# EAGLE board M_C_ext_esp32 (EAGLE 9.6.2)
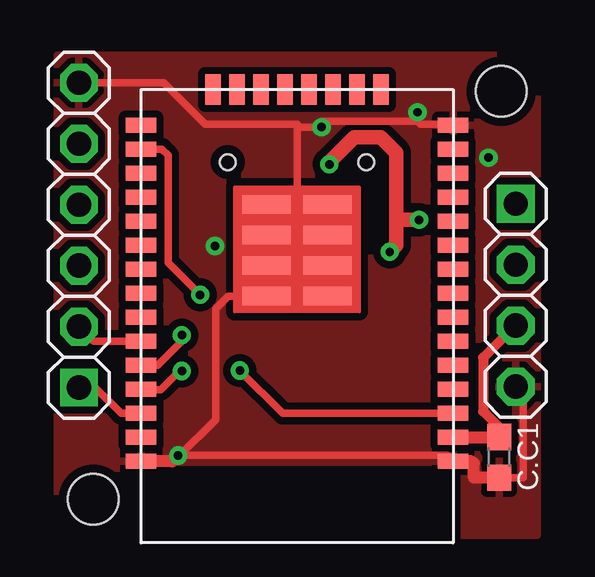
[diagram p0: board, top side]
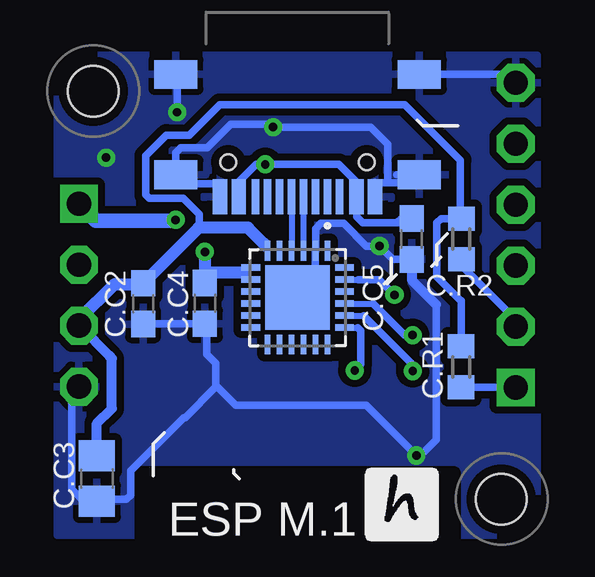
[diagram p1: board, bottom side, seen from below]

No outline drawn. Coordinates in mm, seen from the top.
Copper layers (1*16): Top 0.035mm / dielectric 1.5mm / Bottom 0.035mm
Design rules "default *": minimum track width 10mil, minimum drill 0.35mm, track to track 6mil, track to pad 6mil, pad to pad 6mil, via to via 10mil, smd to smd 10mil, copper to edge 15mil, drill to drill 40mil, minimum pad ring 10mil, minimum via ring 8mil, stop-mask expansion 4mil, vias tented up to drill 0mil, thermal gap 10mil
Holes 2.1 mm at 2,2 19,19

## Footprints (pad centres in the part's own frame; a part is rotated, then mirrored left to right if it is on the bottom)
C0603 = smd 1.1 x 1: 1 -0.85,0; 2 0.85,0
C0805 = smd 1.3 x 1.5: 1 -0.95,0; 2 0.95,0
1X06 = drill 1.016 pad 1.575 square: 1 -6.35,0 | drill 1.016 pad 1.575 octagon: 2 -3.81,0; 3 -1.27,0; 4 1.27,0; 5 3.81,0; 6 6.35,0
R0603 = smd 1 x 1.1: 1 -0.85,0; 2 0.85,0
TTGO-MICRO-32 = smd 1.27 x 0.635: 3V3 -6.5,5; EN -6.5,4; GND1 -6.5,6; GND2 -6.5,-8; GND3 6.5,6; IO0 6.5,-7; IO2 6.5,-8; IO4 6.5,-6; IO5 6.5,-3; IO12 -6.5,-7; IO14 -6.5,-6; IO16 6.5,-5; IO17 6.5,-4; IO18 6.5,-2; IO19 6.5,-1; IO21 6.5,1; IO22 6.5,4; IO23 6.5,5; IO25 -6.5,-3; IO26 -6.5,-4; IO27 -6.5,-5; IO32 -6.5,-1; IO33 -6.5,-2; IO34 -6.5,1; IO35 -6.5,0; NC 6.5,0; RXD0 6.5,2; TXD0 6.5,3; VN -6.5,2; VP -6.5,3 | smd 0.635 x 1.27: CLK 0.5,-9.5; CMD -0.5,-9.5; IO13 -3.5,-9.5; IO15 3.5,-9.5; SD0 1.5,-9.5; SD1 2.5,-9.5; SD2 -2.5,-9.5; SD3 -1.5,-9.5 | smd 2.032 x 0.762: GND4 -1.27,-0.889; GND5 1.27,-0.889; GND6 -1.27,-2.159; GND7 1.27,-2.159; GND8 -1.27,-3.429; GND9 -1.27,-4.699; GND10 1.27,-3.429; GND11 1.27,-4.699
1X04 = drill 1.016 pad 1.575 square: 1 -3.81,0 | drill 1.016 pad 1.575 octagon: 2 -1.27,0; 3 1.27,0; 4 3.81,0
QFN50P400X400X80-25N = smd 0.81 x 0.26: 1 -1.955,1.25; 2 -1.955,0.75; 3 -1.955,0.25; 4 -1.955,-0.25; 5 -1.955,-0.75; 6 -1.955,-1.25; 13 1.955,-1.25; 14 1.955,-0.75; 15 1.955,-0.25; 16 1.955,0.25; 17 1.955,0.75; 18 1.955,1.25 | smd 0.26 x 0.81: 7 -1.25,-1.955; 8 -0.75,-1.955; 9 -0.25,-1.955; 10 0.25,-1.955; 11 0.75,-1.955; 12 1.25,-1.955; 19 1.25,1.955; 20 0.75,1.955; 21 0.25,1.955; 22 -0.25,1.955; 23 -0.75,1.955; 24 -1.25,1.955 | smd 2.68 x 2.68: 25 0,0
USB-C = smd 0.6 x 1.45: A1B12 -3.235,3.825; A4B9 -2.46,3.825; B1A12 3.215,3.825; B4A9 2.44,3.825 | smd 0.3 x 1.45: A5 -1.26,3.825; A6 -0.26,3.825; A7 0.24,3.825; A8 1.24,3.825; B5 1.74,3.825; B6 0.74,3.825; B7 -0.76,3.825; B8 -1.76,3.825 | smd 1.8 x 1.2: SH1 -5.08,2.91; SH2 -5.08,-1.27; SH3 5.06,-1.27; SH4 5.06,2.91 | hole 0.65: 2.88,2.38; -2.9,2.38

## Placement (x,y rotation side)
C.C1  100n  [C0603]  18.91,3.74 270 top
C.C2  100n  [C0603]  16.92,10.15 270 bottom
C.C3  22u  [C0805]  18.85,2.86 270 bottom
C.C4  100n  [C0603]  14.35,10.16 90 bottom
C.C5  10u  [C0603]  5.73,12.84 90 bottom
C.J2  [1X06]  1.4,13 90 top
C.R1  2k2  [R0603]  3.68,7.51 90 bottom
C.R2  2k2  [R0603]  3.66,12.84 90 bottom
C.U1  TTGO-MICRO-32  [TTGO-MICRO-32]  10.49,9.58 180 top
JP1  [1X04]  19.6,10.5 270 top
U1  CP2104-F03-GM  [QFN50P400X400X80-25N]  10.49,10.4 270 bottom
U$1  USB-C  [USB-C]  10.5,18.43 180 bottom

## Library data of the parts
C.C1-C.C5 = rcl; SPICEPREFIX: C
C.J2 JP1 = pinhead2
C.R1 C.R2 = rcl; SPICEPREFIX: R
C.U1 U$1 = hugo
U1 = CP2104; AVAILABILITY: Unavailable; DESCRIPTION: USB Bridge, USB to UART USB 2.0 UART Interface 24-QFN (4x4); MF: Silicon Labs; MP: CP2104; PACKAGE: QFN-24 Silicon Labs; PRICE: None

## Nets
GND: C.C1.2 C.C2.2 C.C3.2 C.C4.1 C.C5.1 C.J2.6 C.U1.GND1 C.U1.GND2 C.U1.GND3 C.U1.GND4 C.U1.GND5 C.U1.GND6 C.U1.GND7 C.U1.GND8 C.U1.GND9 C.U1.GND10 C.U1.GND11 JP1.4 U1.2 U1.25 U$1.A1B12 U$1.B1A12 U$1.SH1 U$1.SH2 U$1.SH3 U$1.SH4
N$1: U1.4 U$1.A7
N$2: U1.3 U$1.A6
PROG: C.U1.IO0 U1.23
RESET: C.U1.EN U1.19
RX: C.U1.TXD0 U1.20
SCL: C.J2.1 C.R1.1 C.U1.IO22
SDA: C.J2.2 C.R2.1 C.U1.IO21
TX: C.U1.RXD0 U1.21
VCC: C.C1.1 C.C2.1 C.C3.1 C.R1.2 C.R2.2 C.U1.3V3 JP1.3 U1.6
VIO: U1.5
VUSB: C.C4.2 C.C5.2 JP1.1 U1.7 U1.8 U$1.A4B9 U$1.B4A9

## Tracks (layer width: path | path; a pad name or v marks a point on that pad's centre or on a via)
GND  (via drill 0.35)
  Top 0.305: C.U1.GND2 16.94,17.63 15.65,17.63 15.51,17.77 v15.51,18.12 15.51,17.75 11.51,17.75 v11.51,17.5 10.49,17.5 | v5.54,3.82 5.29,3.57 | C.U1.GND3 | C.J2.6 4.93,19.35 6.66,17.63 10.49,17.63 10.49,17.5 | C.U1.GND4 10.11,12.12 | 18.91,2.91 C.C1.2 19.91,2.9 19.91,6.38 JP1.4 | 10.49,17.5 10.49,14.5 | 10.49,14.5 10.49,13.74 11.23,13.01 C.U1.GND8 | C.U1.GND5 7.62,10.46 7.09,9.94 7.09,5.31 5.61,3.82 v5.54,3.82 | v5.54,3.82 16.74,3.82 C.U1.GND1 | C.U1.GND9 11.76,13.37 12.32,12.81 12.18,12.81 10.49,14.5
  Top 0.508: 5.29,3.57 C.U1.GND3 | C.C1.2 17.86,2.9 17.86,3.48 17.76,3.58 C.U1.GND1 16.95,3.61
  Bottom 0.305: C.C3.2 18.78,1.91 | 4.71,10.11 4.71,4.47 5.36,3.82 v5.54,3.82 7.62,5.91 13.06,5.91 13.83,6.67 13.9,6.67 | 15.49,18.12 v15.51,18.12 15.51,19.65 U$1.SH3 | 5.75,11.96 C.C5.1 6.52,11.99 v7.07,12.55 7.62,12.55 8.56,13.49 9.53,13.49 9.74,13.27 U1.2 9.74,11.7 10.49,10.96 U1.25 9.74,11.15 9.74,11.95 | C.C2.2 C.C4.1 14.27,9.23 14.27,8.05 13.89,7.67 13.9,7.66 13.9,6.67 | 6.35,15.52 U$1.SH1 5.75,15.19 7.26,15.19 | U$1.A1B12 7.26,15.19 | 7.26,15.19 7.26,15.21 | U$1.SH4 15.56,16.43 15.36,16.64 14.25,16.64 13.27,17.62 11.62,17.62 v11.51,17.5 7.44,17.5 6.73,16.79 6.73,15.24 | U$1.SH2 1.75,19.7 C.J2.6 | C.C3.2 18.77,1.99 17.62,1.99 17.45,2.16 17.45,3.18 15.22,5.4 15.18,5.4 13.9,6.67 | 15.32,15.52 U$1.SH4 | U$1.SH4 15.18,15.14 13.82,15.14 13.71,15.04 U$1.B1A12 | JP1.4 19.9,6.39 19.9,2.42 19.39,1.91 C.C3.2
  Bottom 0.406: C.C5.1 5.73,11.12 4.71,10.11
  other vias: 18.47,16.23
  pour Top (isolate 0.305): 0.5,0.5 0.5,20.5 20.5,20.5 20.5,0.5
  pour Bottom (isolate 0.305): 0.5,20.5 20.5,20.5 20.5,0.5 0.5,0.5
N$1
  Bottom 0.254: U$1.A7 U1.4
  Bottom 0.305: U$1.A7 | U$1.A7
N$2
  Bottom 0.254: U1.3 U$1.A6
PROG  (via drill 0.35)
  Top 0.305: C.U1.IO0 4.32,16.58 4.33,16.59 4.86,16.59 5.12,16.33 5.12,11.85 v6.45,10.52
  Bottom 0.254: 8.53,11.16 U1.23 7.96,11.15
  Bottom 0.305: v6.45,10.52 7.09,11.15 7.96,11.15
RESET  (via drill 0.35)
  Top 0.305: C.U1.EN 9.9,5.57 v8.11,7.36
  Bottom 0.254: U1.19 7.98,9.15
  Bottom 0.305: 7.98,9.15 7.85,9.02 7.85,7.62 v8.11,7.36
RX  (via drill 0.35)
  Top 0.305: C.U1.TXD0 4.01,6.56 4.82,6.56 5.6,7.34 v5.69,7.34
  Bottom 0.254: U1.20 7.74,9.65
  Bottom 0.305: v5.69,7.34 5.69,7.6 7.74,9.65
SCL
  Top 0.305: C.U1.IO22 3.16,5.58 2.09,6.65 C.J2.1
  Bottom 0.305: C.R1.1 1.4,6.66 C.J2.1
SDA
  Top 0.305: C.U1.IO21 2.01,8.58 C.J2.2
  Bottom 0.305: C.R2.1 3.65,11.72 1.4,9.47 C.J2.2
TX  (via drill 0.35)
  Top 0.305: C.U1.RXD0 4.69,7.58 5.69,8.59 v5.69,8.84
  Bottom 0.254: U1.21 7.34,10.15
  Bottom 0.305: 7.34,10.15 6.02,8.84 v5.69,8.84
VCC
  Top 0.305: C.C1.1 18.98,4.67
  Top 0.406: 17,4.56 C.U1.3V3 | JP1.3 19.57,9.23 18.24,7.9 18.24,5.66 18.91,4.99 C.C1.1
  Top 0.508: C.C1.1 18.88,4.56 17,4.56
  Bottom 0.254: U1.6 11.87,12.48
  Bottom 0.305: 19.6,9.47 JP1.3 | C.R2.2 3.58,13.69 | C.R1.2 3.67,10.27 3.68,10.26 4.68,11.26 4.68,13.51 4.5,13.69 C.R2.2 | 16.8,11.14 C.C2.1 | 14.59,13.29 14.61,13.31 14.6,13.32 | 14.59,13.29 14.59,13.88 15.25,14.54 16.68,14.54 16.82,14.68 16.82,16.31 15.95,17.17 15,17.17 13.74,18.44 6.01,18.44 3.71,16.13 3.71,13.73 C.R2.2 | 14.59,13.29 14.59,13.28 | 11.87,12.48 11.87,12.62
  Bottom 0.406: C.C3.1 18.85,5.16 18.23,5.78 18.23,7.86 18.3,7.93 18.3,7.96 19.57,9.23 JP1.3
  Bottom 0.508: 19.6,9.47 18.11,10.96 16.96,10.96 C.C2.1 14.61,13.31 12.56,13.31 11.87,12.62
VUSB  (via drill 0.35)
  Top 0.61: v11.84,15.95 11.84,16.04 12.88,17.09 13.98,17.09 14.63,16.43 14.63,13.64 | v15.57,13.64 14.63,13.64 | 14.63,13.64 14.63,12.59 v14.35,12.31
  Bottom 0.254: U1.7 12.59,11.65 12.62,11.61 | 12.62,11.25 12.52,11.15 U1.8
  Bottom 0.305: U$1.A4B9 8.1,14.55 | C.C5.2 6.17,13.69 6.29,13.57 6.29,13.52 7.78,13.52 8.02,13.76 8.02,14.59 U$1.A4B9 | U$1.A4B9 8.04,15.22 8.77,15.95 v11.84,15.95 12.21,15.95 12.92,15.24 12.92,14.95 12.94,14.93 U$1.B4A9 | v15.57,13.64 15.58,13.65 | 14.1,11.48 14.02,11.41 14.02,10.68 C.C4.2 14.3,11.06 14.3,12.25 v14.35,12.31 | 12.62,11.61 12.62,11.25 12.84,11.47 12.84,11.45
  Bottom 0.508: v14.35,12.31 14.35,11.6 14.21,11.45 12.84,11.45
  Bottom 0.61: v15.57,13.64 15.61,13.61 18.89,13.61 JP1.1

## Text on the board
bPlace: ESP M.1